# Altium PCB PIC18F57Q84_Curiosity_Nano.PcbDoc (part 2 of 3)
Units mm, origin at the board's own origin, x right, y up, seen from the top; angles counter-clockwise.
Board outline 83.82 x 20.32 mm, 4 copper layers (Top Layer, Gnd Plane, Pwr Plane, Bottom Layer), stack 1.574 mm thick; 85 components, 108 nets, 442 pads, 224 vias.
Unrouted connection lines stored in the file: 1.
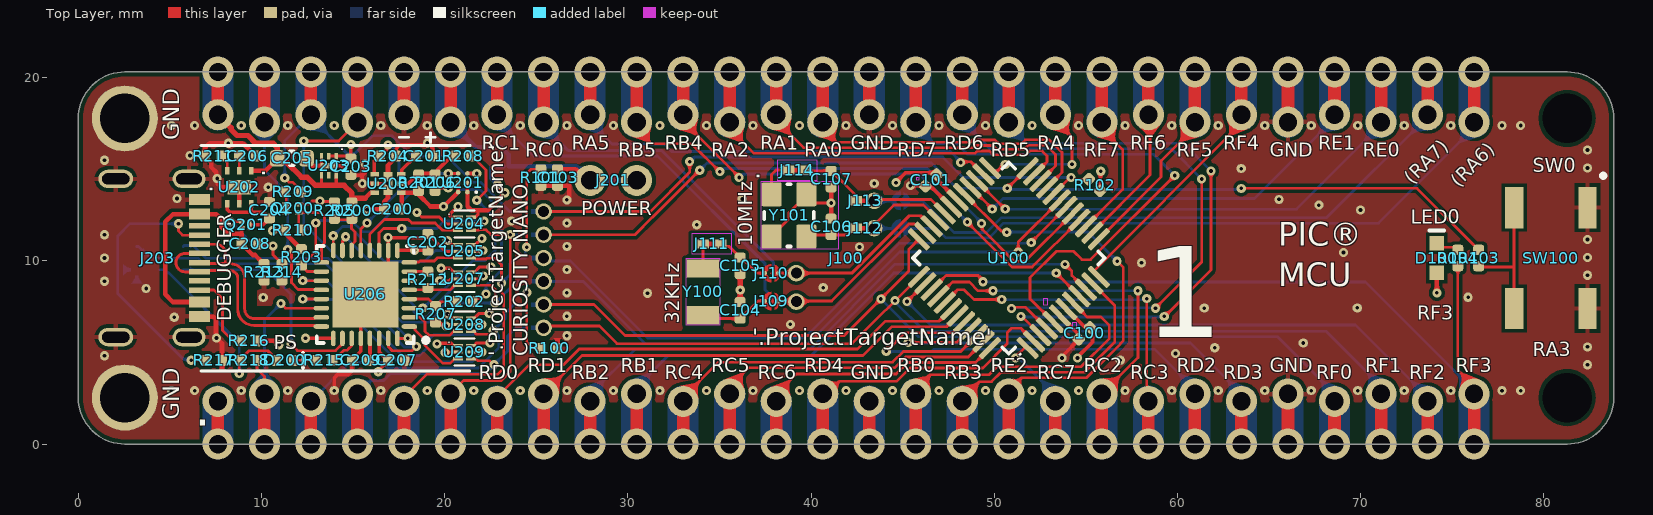
[diagram p0: Top Layer view]

## Via types
v1: diameter 0.5, hole 0.2, Top Layer to Bottom Layer, 214 vias
v2: diameter 0.5, hole 0.2, Top Layer to Bottom Layer, tented both sides, 8 vias
v3: diameter 0.5, hole 0.2, Top Layer to Bottom Layer, tented top, 2 vias

## Nets (pads, with @x,y where several pads share a name; then routed paths per layer and width w, separated by ;. In a path a pad name is that pad's centre, name@x,y a point inside that pad or via, vN(x,y) a via of type N, cw(c..) or ccw(c..) an arc to the next point about the centre after c; other vN are vias at no path point) (continued)
DBG2: (continued)
  Top Layer w0.15: J100.6@20.32,2.743 20.32,2.766 21.029,3.475 23.087,3.475 23.58,3.968 23.58,5.376 v1(23.58,11.435) ; U204.4@21.429,11.675 21.855,11.675 21.88,11.7 22.255,11.7 22.52,11.435 v1@23.555,11.435
  Bottom Layer w0.15: v1@23.555,11.435 v1(23.58,11.435) J106.1@24.4,11.435
DBG2_CTRL: U204.5 U206.11 | length 12.7
  Top Layer w0.15: U206.11@16.416,10.556 16.416,11.537 16.654,11.775 v1(17.655,11.775) ; U204.5@21.429,12.025 21.88,12.025 22.03,12.175 v1(22.154,12.175) v1@22.254,12.175
  Bottom Layer w0.15: 19.571,11.775 v1(17.655,11.775) 19.571,11.775 ; 19.571,11.775 19.971,12.175 ; 19.571,11.775 19.971,12.175 ; 19.971,12.175 v1(22.154,12.175) ; 19.971,12.175 v1(22.154,12.175) ; v1(22.154,12.175) 22.254,12.175 v1(22.154,12.175)
DBG2_GPIO: U204.3 U206.12 | length 6.3
  Top Layer w0.15: U206.12@15.916,10.556 15.916,11.461 16.722,12.267 18.013,12.267 18.205,12.075 19.479,12.075 19.879,11.675 U204.3@20.729,11.675
DBG3: J100.54 J102.1 R209.2 | length 20.1
  Top Layer w0.15: v1(11.265,14.525) 11.49,14.3 11.69,14.3 12.214,13.776 R209.2@12.214,13.7
  Bottom Layer w0.15: v1(11.265,14.525) 11.265,16.548 J100.54@12.7,17.983 12.7,17.834 14.652,15.882 15.107,15.882 16.054,16.829 17.124,16.829 18.234,15.72 20.095,15.72 21.515,14.3 21.951,14.3 23.551,12.7 J102.1@24.4,12.7
DBG3_CTRL: Q200.1 R210.1 U206.17 | length 5.1
  Top Layer w0.15: R210.1@12.215,11.684 12.04,11.859 Q200.1@12.04,12.65 13.242,12.65 13.441,12.451 13.441,10.986 13.28,10.825 U206.17@13.28,9.924
GND: C100.2 C101.1 C103.1 C104.1 C105.2 C106.1 C107.1 C200.1 C201.2 C202.1 C203.1 C204.1 C205.1 C206.1 C207.2 C209.1 J100.15 J100.24 J100.33 J100.42 J100.52 J202.2 J203.1 J203.2 J203.3 J203.4 J203.A1/B12 J203.B1/A12 Q200.2 R100.2 R101.2 R203.2 R204.2 R205.1 R206.1 R207.1 R210.2 R211.2 R213.2 R214.2 R216.2 R217.2 SW100.1 SW100.2 TP200.1 TP201.1 TP203.1 U100.6 U100.31 U200.2 U200.7 U201.C1 U202.5 U202.7 U203.3 U203.7 U204.2 U205.2 U206.10 U206.28 U206.33 U207.2 U208.2 U209.2 Y101.2 Y101.4 | length 67.5
  Top Layer w0.15: Q200.2@12.04,13.1 12.575,13.1 12.75,13.275 v1(13.19,13.275) 13.215,13.25 R205.1@13.979,13.25
  Top Layer w0.166: v1(18.48,12.65) 18.73,12.4 19.71,12.4 20.085,12.025 U204.2@20.729,12.025 ; C202.1@19.058,11.5 20.033,10.525 U205.2@20.729,10.525 ; v1(19.734,8.925) 19.759,8.9 19.804,8.9 20.217,8.9 20.343,9.025 U207.2@20.729,9.025 ; v1@20.13,5.025 U209.2@20.729,5.025 ; v1@20.155,6.525 U208.2@20.729,6.525
  Top Layer w0.175: U203.3@13.279,15.725 13.279,15.2 U203.7@13.679,15.2 ; v1(15.505,14.225) U200.2@16.18,14.225 v1(16.905,14.225) ; R204.2@17.355,15.725 17.355,16.122 17.59,16.357 18.89,16.357 18.969,16.436 v1(19.057,16.436) 19.355,16.138 C201.2@19.355,15.725 ; R206.1@19.48,13.775 19.68,13.975 v1(20.199,13.975) ; R207.1@19.555,6.525 19.559,6.521 19.861,6.521 19.932,6.45 v1(20.08,6.45) v1@20.155,6.525 ; v1(20.023,4.998) 20.103,4.998 v1@20.13,5.025 ; v1@20.089,5.025 v1@20.13,5.025 ; v1@20.125,5.02 v1@20.13,5.025 ; Y101.2@38,11.385 38,11.51 38.8,12.31 38.8,12.635 Y101.4@39.6,13.435 ; Y101.4@39.6,13.585 Y101.4@39.6,13.435 ; v1(41.1,13.165) 39.87,13.165 Y101.4@39.6,13.435
  Top Layer w0.2: U203.7@13.679,15.2 14.354,15.2 14.879,14.675 15.38,14.675 15.505,14.55 ; v1(13.97,2.921) 13.97,3.615 14.155,3.8 14.732,3.8 14.93,3.998 14.93,4.575 15.424,5.069 15.424,7.909 U206.33@15.679,8.164 ; v1(15.505,14.225) 15.505,14.55 ; 15.505,14.705 15.505,14.55 ; U206.33@15.689,8.174 16.916,9.401 16.916,11.112 17.063,11.259 18.817,11.259 C202.1@19.058,11.5 ; U201.C1@21.242,14.775 v1(21.755,14.775) ; v1(45.425,14.117) 45.995,14.117 46.031,14.082 C101.1@46.232,14.082 ; C101.1@46.232,14.202 46.405,14.202 U100.31@47.653,12.953 ; U100.6@53.593,7.013 54.678,5.929 54.678,5.626 54.543,5.626 53.847,4.93 53.699,4.781 v1(53.699,4.7)
  Top Layer w0.25: J203.A1/B12@6.39,13.36 J203.A1/B12@6.665,13.36 ; J203.B1/A12@6.665,6.96 7.368,6.96 7.515,6.814 7.515,5.821 7.844,5.493 R217.2@7.844,4.575 ; U202.5@8.785,13.128 U202.7@8.785,14.028 7.784,14.028 7.627,14.186 7.627,14.452 7.535,14.544 7.535,14.84 7.246,15.128 7.246,15.393 7.081,15.558 7.062,15.558 6.913,15.707 6.913,16.168 7.172,16.426 v1(8.19,16.426) 8.192,16.424 8.986,16.424 9.518,15.892 9.536,15.892 9.685,15.743 C206.1@9.685,15.725 ; R216.2@9.752,5.633 10.684,5.633 10.892,5.425 v2(10.96,5.425) ; v1(10.599,11.649) 10.617,11.667 11.248,11.667 R210.2@11.265,11.684 11.407,11.542 11.407,11.412 12.008,10.811 12.008,10.793 12.157,10.644 R203.2@12.175,10.644 ; C205.1@12.356,15.597 12.754,15.2 U203.7@13.279,15.2 ; 15.505,14.705 15.655,14.855 v1(15.655,15.325) ; v1(15.755,12.8) 15.782,12.827 C200.1@16.695,12.827 16.695,13.233 16.905,13.443 v1(16.905,14.225) 16.905,15.225 R204.2@17.405,15.725 ; R101.2@25.248,14.104 C103.1@26.162,14.104 26.794,14.104 26.794,13.459 v1(26.67,13.335) ; C104.1@36.135,7.75 v1(36.135,8.408) C105.2@36.135,9.286 ; C106.1@41.1,12.31 C107.1@41.1,14.02
  other v1: 5.08,2.921 6.35,2.921 8.89,2.921 11.43,2.921 16.51,2.921 19.05,2.921 21.59,2.921 24.13,2.921 26.67,2.921 29.21,2.921 31.75,2.921 34.29,2.921 36.83,2.921 39.37,2.921 41.91,2.921 44.45,2.921 46.99,2.921 49.53,2.921 52.07,2.921 54.61,2.921 57.15,2.921 59.69,2.921 62.23,2.921 64.77,2.921 67.31,2.921 69.85,2.921 72.39,2.921 74.93,2.921 77.724,2.921 78.74,2.921 82.391,4.331 56.881,4.575 1.429,4.826 59.9,4.947 62.041,5.265 82.391,5.308 66.875,5.519 7.544,5.792 26.67,5.915 38.875,6.539 26.67,6.985 61.466,7.427 69.825,7.437 75.875,8.015 31.076,8.233 26.67,8.255 40.669,8.544 1.429,8.89 82.391,9.216 26.67,9.525 58.044,9.905 1.429,10.16 82.391,10.193 69.075,10.464 42.65,10.766 26.67,10.795 82.391,11.17 16.913,11.284 1.429,11.43 33.764,11.977 26.67,12.065 23.655,12.175 70,12.786 67.725,13.048 65.55,13.361 36.243,13.378 5.39,13.413 10.366,14.025 43.449,14.23 7.579,14.5 63.489,15.038 82.391,15.078 1.429,15.494 6.1,15.755 82.391,16.055 5.08,17.399 6.35,17.399 8.89,17.399 11.43,17.399 13.97,17.399 16.51,17.399 19.05,17.399 21.59,17.399 24.13,17.399 26.67,17.399 29.21,17.399 31.75,17.399 34.29,17.399 36.83,17.399 39.37,17.399 41.91,17.399 44.45,17.399 46.99,17.399 49.53,17.399 52.07,17.399 54.61,17.399 57.15,17.399 59.69,17.399 62.23,17.399 64.77,17.399 67.31,17.399 69.85,17.399 72.39,17.399 74.93,17.399 77.724,17.399 78.74,17.399
  other v2: 5.235,6.924 10.093,8.006 3.701,8.493
ID_SYS: J100.2 R218.1 U206.22 | length 9.6
  Top Layer w0.15: R218.1@9.748,4.513 9.748,4.114 10.16,3.703 J100.2@10.16,2.743 ; v1(11.055,7.675) 11.306,7.424 U206.22@13.28,7.424
  Bottom Layer w0.15: J100.2@10.16,2.743 10.16,6.78 v1(11.055,7.675)
NetC106_2: C106.2 J112.1 Y101.3 | length 2.9
  Top Layer w0.159: Y101.3@39.75,11.335 39.825,11.41 C106.2@41.1,11.41 41.984,11.41 42.189,11.615 42.279,11.615 J112.1@42.45,11.785
NetC107_2: C107.2 J113.1 J114.1 | length 3.6
  Top Layer w0.159: J114.1@39.725,14.96 39.765,14.92 C107.2@41.1,14.92 42.34,13.68 42.34,13.395 J113.1@42.45,13.285
NetC201_1: C201.1 U200.6 | length 1.3
  Top Layer w0.2: U200.6@17.655,14.725 17.655,14.975 C201.1@18.405,15.725
NetC206_2: C206.2 U202.2 | length 0.8
  Top Layer w0.15: U202.2@8.785,14.899 C206.2@8.785,15.725